# EAGLE board J2 Retrofit (EAGLE 9.1.2)
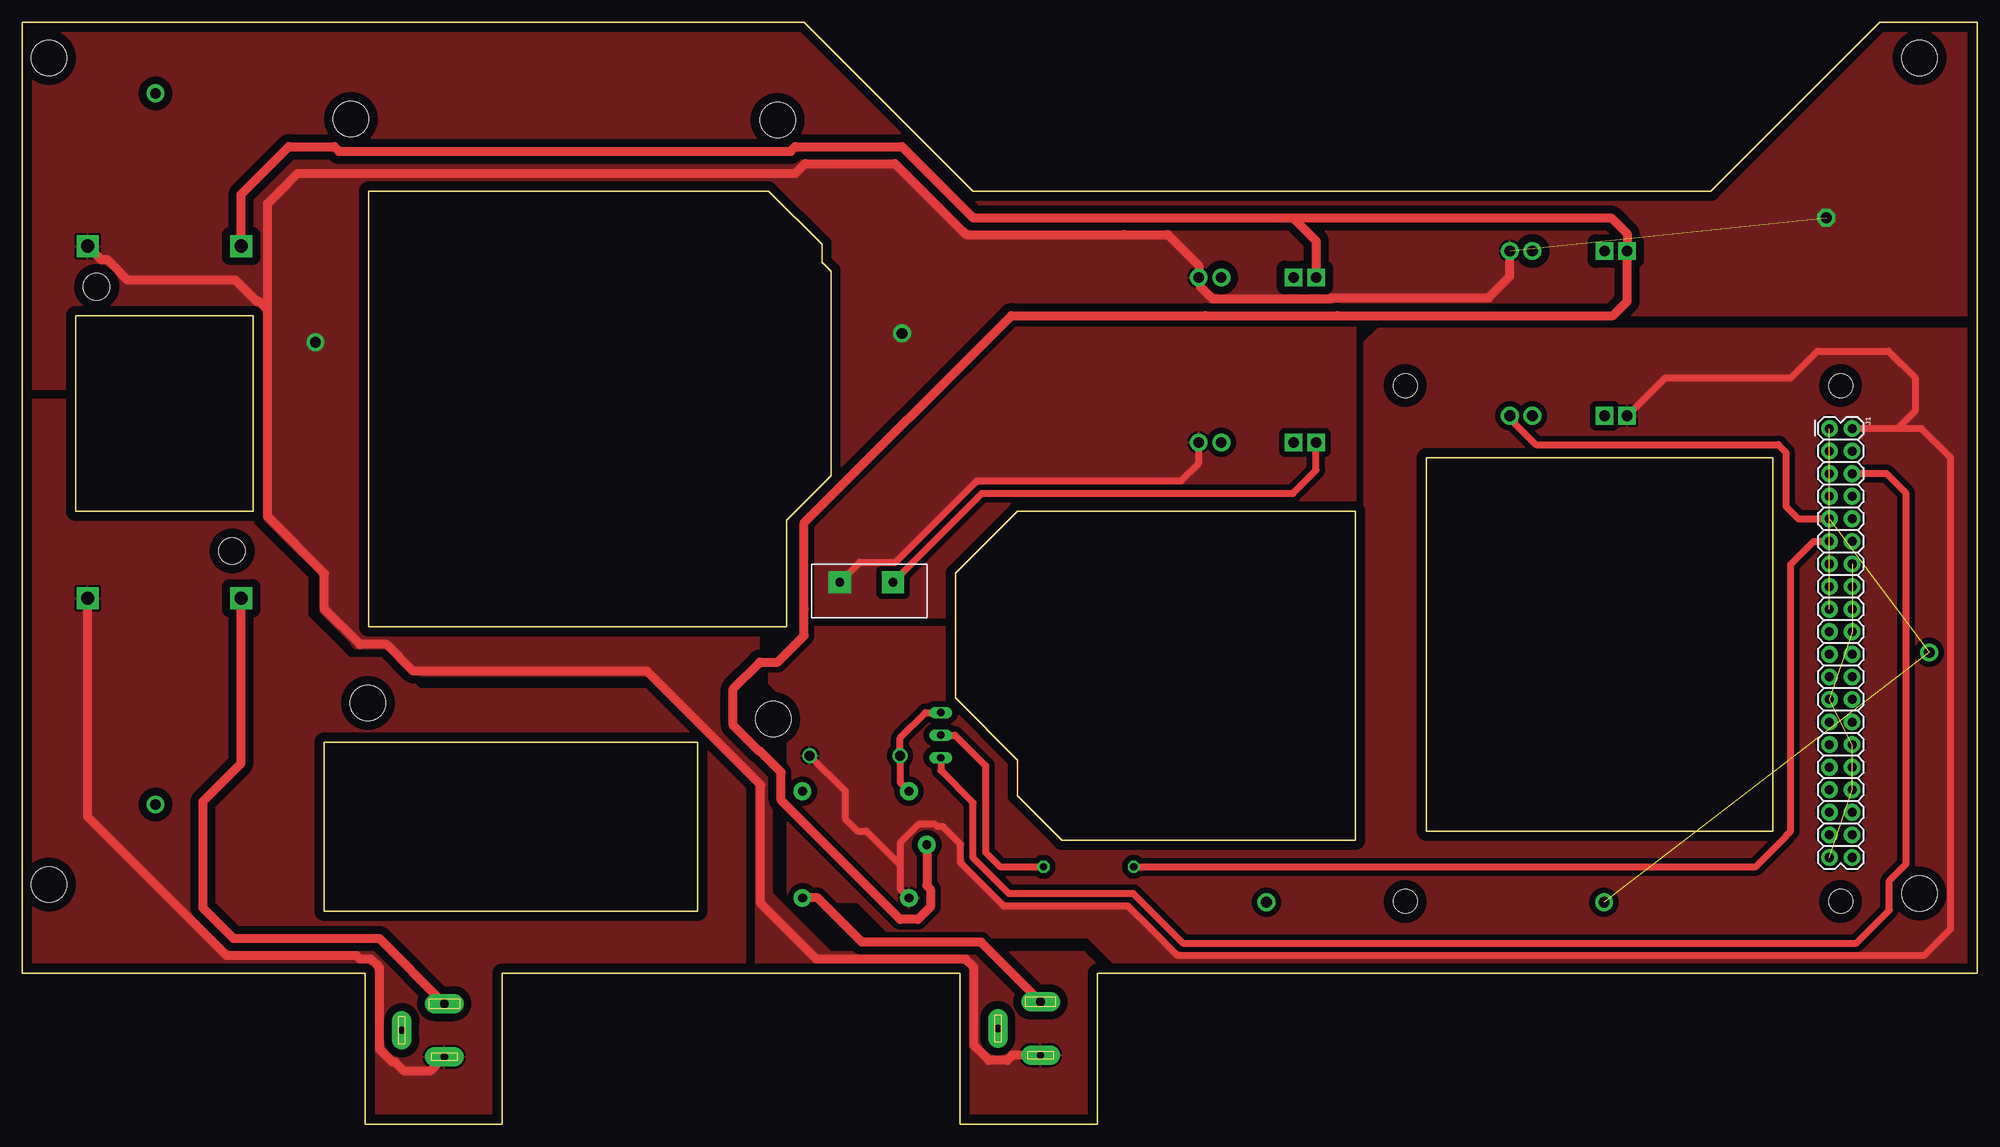
[diagram p0: board, top side]
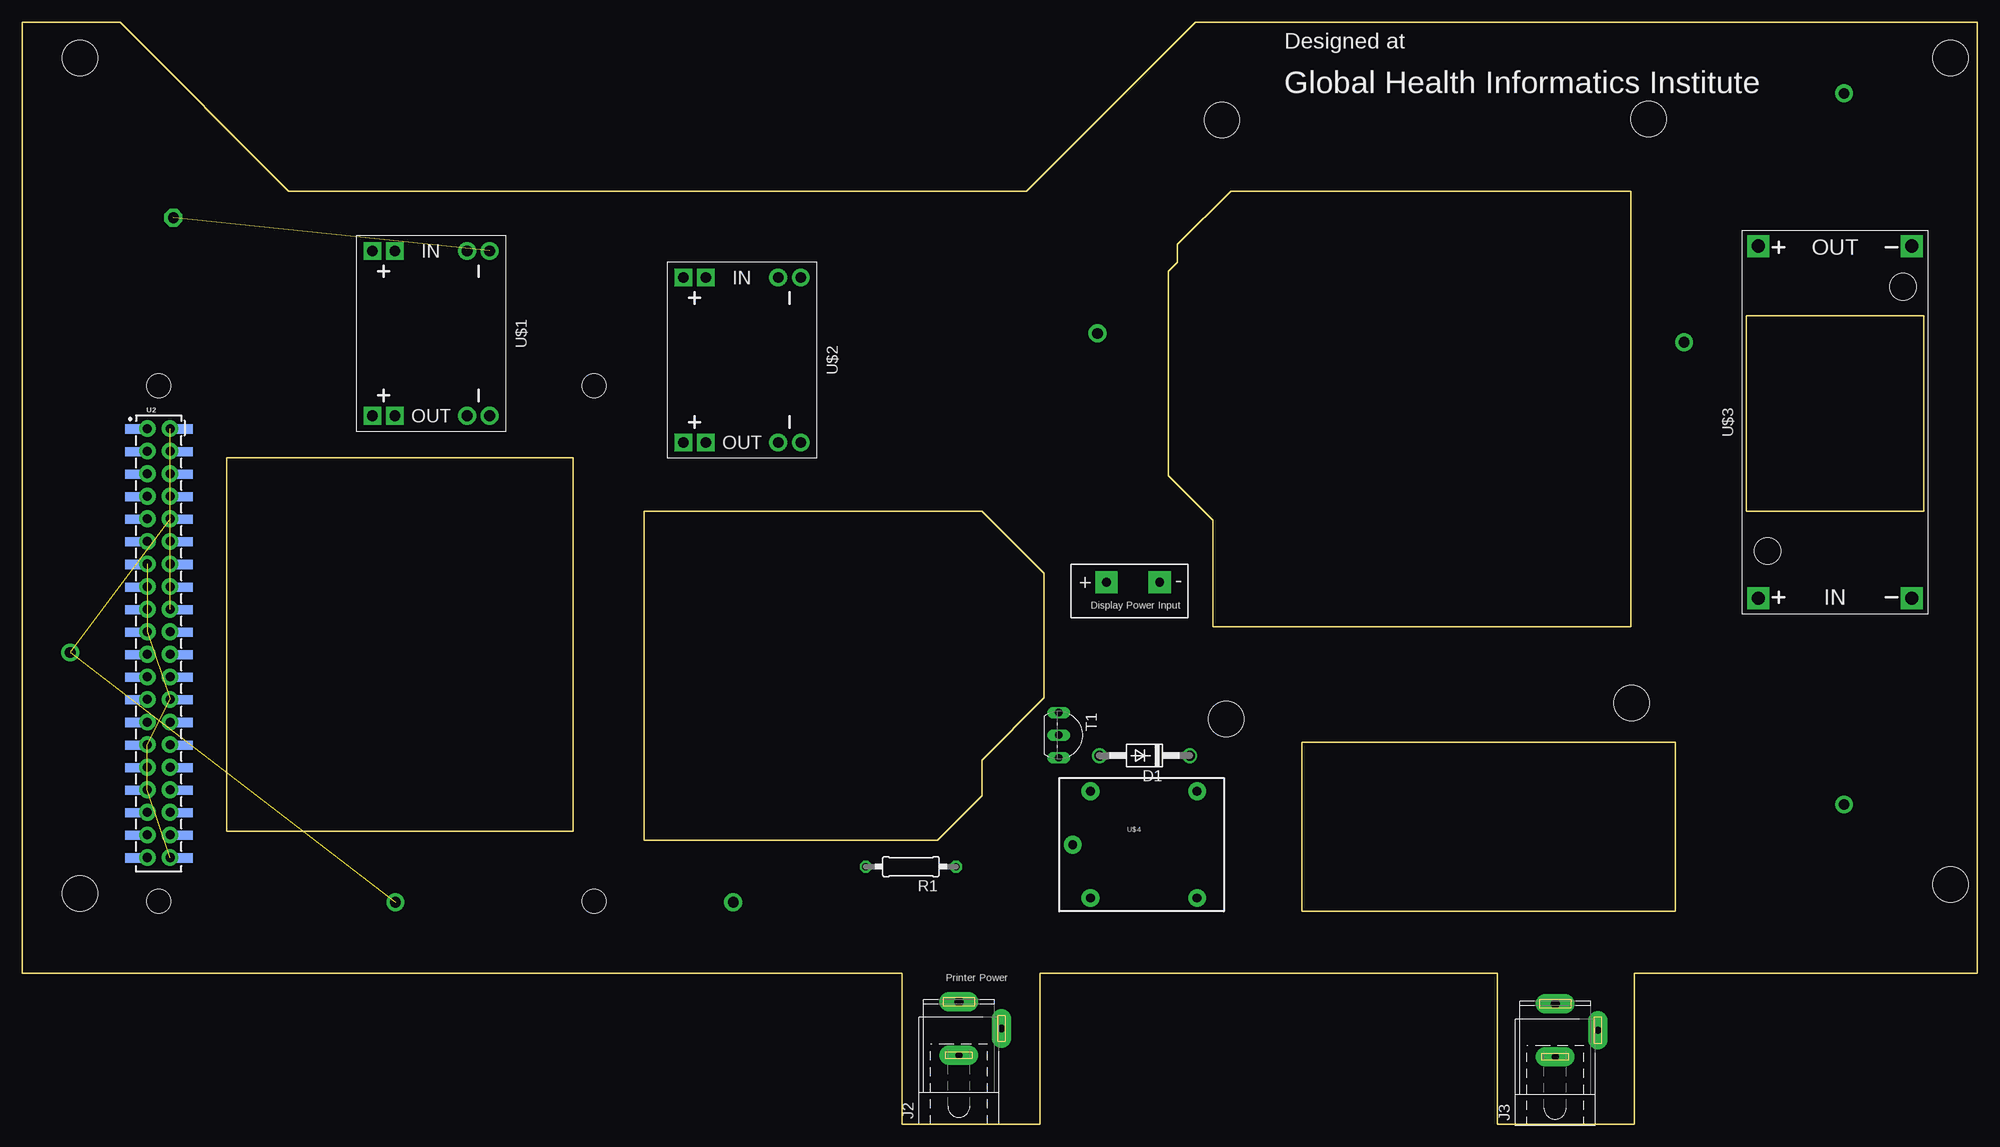
[diagram p1: board, bottom side, seen from below]

Size 220 x 124 mm. Coordinates in mm from the lower left corner, seen from the top.
Outline: 0,17 0,124 88,124 107,105 190,105 209,124 220,124 220,17 121,17 121,0 105.5,0 105.5,17 54,17 54,0 38.6,0 38.6,17 0,17
Outline: 39,105 84,105 90,99 90,97 91,96 91,73 86,68 86,56 39,56 39,105
Outline: 158,75 197,75 197,33 158,33 158,75
Outline: 6,91 26,91 26,69 6,69 6,91
Outline: 34,43 76,43 76,24 34,24 34,43
Outline: 150,69 112,69 105,62 105,48 112,41 112,37 117,32 150,32 150,69
Copper layers (1*16): Top 0.035mm / dielectric 1.5mm / Bottom 0.035mm
Design rules "default": minimum track width 6mil, minimum drill 0.35mm, track to track 6mil, track to pad 6mil, pad to pad 6mil, via to via 6mil, smd to smd 6mil, copper to edge 40mil, drill to drill 6mil, minimum pad ring 10mil, minimum via ring 8mil, stop-mask expansion 4mil, vias tented up to drill 0mil, thermal gap 10mil
Net classes: 0 default: width 0.762 mm, drill 0.762 mm, clearance 0.635 mm; 1 Power: width 1.016 mm, drill 1.016 mm, clearance 0.889 mm
Holes 4 mm at 3,27 3,120 213.5,120 213.5,26 38.9,47.4 84.5,45.6 37,113.1 85,113

## Footprints (pad centres in the part's own frame; a part is rotated, then mirrored left to right if it is on the bottom)
DO41-10 = drill 1.118: A 5.08,0; C -5.08,0
2X20 = drill 1.016 pad 1.88: 1 0,0; 2 0,2.54; 3 2.54,0; 4 2.54,2.54; 5 5.08,0; 6 5.08,2.54; 7 7.62,0; 8 7.62,2.54; 9 10.16,0; 10 10.16,2.54; 11 12.7,0; 12 12.7,2.54; 13 15.24,0; 14 15.24,2.54; 15 17.78,0; 16 17.78,2.54; 17 20.32,0; 18 20.32,2.54; 19 22.86,0; 20 22.86,2.54; 21 25.4,0; 22 25.4,2.54; 23 27.94,0; 24 27.94,2.54; 25 30.48,0; 26 30.48,2.54; 27 33.02,0; 28 33.02,2.54; 29 35.56,0; 30 35.56,2.54; 31 38.1,0; 32 38.1,2.54; 33 40.64,0; 34 40.64,2.54; 35 43.18,0; 36 43.18,2.54; 37 45.72,0; 38 45.72,2.54; 39 48.26,0; 40 48.26,2.54
SPC4078 = drill 0.8 pad 2.184 long: 1 -3,0; 2 0,-4.8 | drill 1 pad 2.184 long: 3 3,0
0207/10 = drill 0.813 octagon: 1 -5.08,0; 2 5.08,0
TO92-EBC-OVAL = drill 0.813 long: B 0,-1.27; C 2.54,-1.27; E -2.54,-1.27
RASPBERRY_PI_SHIELD_HOLES = smd 1.02 x 1.87: 1 8.382,7.686; 2 8.382,1.929; 3 10.922,7.686; 4 10.922,1.929; 5 13.462,7.686; 6 13.462,1.929; 7 16.002,7.686; 8 16.002,1.929; 9 18.542,7.686; 10 18.542,1.929; 11 21.082,7.686; 12 21.082,1.929; 13 23.622,7.686; 14 23.622,1.929; 15 26.162,7.686; 16 26.162,1.929; 17 28.702,7.686; 18 28.702,1.929; 19 31.242,7.686; 20 31.242,1.929; 21 33.782,7.686; 22 33.782,1.929; 23 36.322,7.686; 24 36.322,1.929; 25 38.862,7.686; 26 38.862,1.929; 27 41.402,7.686; 28 41.402,1.929; 29 43.942,7.686; 30 43.942,1.929; 31 46.482,7.686; 32 46.482,1.929; 33 49.022,7.686; 34 49.022,1.929; 35 51.562,7.686; 36 51.562,1.929; 37 54.102,7.686; 38 54.102,1.929; 39 56.642,7.686; 40 56.642,1.929 | hole 2.75: 3.512,4.775; 61.512,4.775; 61.512,53.775; 3.512,53.775
DC-DC-STEP-DOWN-MP1584 = drill 1.2 pad 2 square: IN+.1 -9.271,-4.064; IN+.2 -9.271,-6.604; OUT+.1 9.271,-4.064; OUT+.2 9.271,-6.604 | drill 1.2 pad 2: IN-.1 -9.271,6.604; IN-.2 -9.271,4.064; OUT-.1 9.271,6.604; OUT-.2 9.271,4.064
DC-DC-STEP-DOWN-LM2596 = drill 1.5 pad 2.5 square: IN+ -19.812,8.636; IN- -19.812,-8.636; OUT+ 19.812,8.636; OUT- 19.812,-8.636 | hole 3: -14.478,7.62; 15.24,-7.62
SRD-05VDC-SL-C = drill 1 pad 2: COIL0 -5.39,-6.12; COIL1 -5.39,5.88; SWCLOSED 6.61,-6.12; SWCOMMON -7.39,-0.12; SWOPEN 6.61,5.88

## Placement (x,y rotation side)
D1  1N4004  [DO41-10]  93.7,41.5 180 bottom
J1  RASPBERRYPI-40-PIN-GPIO_PTH_NO_SHROUD  [2X20]  203.37,78.29 270 top
J2  [SPC4078]  114.6,10.8 90 bottom
J3  [SPC4078]  47.5,10.6 90 bottom
R1  [0207/10]  120,29 180 bottom
T1  2N2222  [TO92-EBC-OVAL]  102.1,43.8 270 bottom
U2  RASPBERRY_PI_40SMD  [RASPBERRY_PI_SHIELD_HOLES]  209.41,86.62 270 bottom
U$1  DC-DC-STEP-DOWN-MP1584  [DC-DC-STEP-DOWN-MP1584]  174,89 270 bottom
U$2  DC-DC-STEP-DOWN-MP1584  [DC-DC-STEP-DOWN-MP1584]  139,86 270 bottom
U$3  DC-DC-STEP-DOWN-LM2596  [DC-DC-STEP-DOWN-LM2596]  16,79 90 bottom
U$4  RELAYPTH  [SRD-05VDC-SL-C]  94.4,31.6 0 bottom

## Library data of the parts
D1 = diode
J1 U2 = SparkFun-Connectors
J2 J3 = con-jack; OC_FARNELL: unknown; OC_NEWARK: unknown
R1 = resistor
T1 = adafruit
U$1 = GHIdiy-modules
U$2 U$3 = diy-modules
U$4 = SRD-Relay

## Nets
3.3V: J1.1 J1.17
5V: J1.4
GND: J1.14 J1.20 J1.25 J1.30 J1.34 J1.39
N$1 [Power]: J3.1 U$3.IN-
N$2: U$2.OUT-.1
N$3 [Power]: J3.3 U$3.IN+
N$4: U$2.OUT+.2
N$5 [Power]: U$1.IN+.2 U$2.IN+.2 U$3.OUT+ U$4.SWCOMMON
N$6: J1.11 R1.2
N$7: J1.6 T1.C
N$8 [Power]: J2.1 U$1.IN-.1 U$2.IN-.1 U$3.OUT-
N$9: D1.C J1.2 U$1.OUT+.2 U$4.COIL0
N$10: J1.9 U$1.OUT-.1
N$11: D1.A T1.E U$4.COIL1
N$16: R1.1 T1.B
N$18 [Power]: J2.3 U$4.SWCLOSED

## Tracks (layer width: path | path; a pad name or v marks a point on that pad's centre or on a via)
3.3V  (1 unrouted)
GND  (5 unrouted)
N$1
  Top 1.016: J3.1 45.9,6 43,6 41.98,7.02 41.67,7.02 40.2,8.49 40.2,17.66 39.26,18.6 38,18.6 37.6,19 23,19 7.36,34.64 U$3.IN-
  pour Top: 5.4,81.6 0,81.6 0,17 38.3,17 38.3,0 54,0 54,17 81.4,17 81.4,38 70.4,49 44.7,49 41.2,52.5 36.8,52.5 35.3,54 32.1,57.2 32.1,61.5 26,67.6 26,69 26,81.6
N$2  (via drill 1 pad 2.5)
  Top 0.762: v92,61 94.27,63.27 98.29,63.27 107.42,72.4 130.4,72.4 132.4,74.4 U$2.OUT-.1
  pour Top: 105,57 86,57 86,64.4 111.5,89.9 150.1,89.9 150.1,86.9 150.1,70.3 148.8,69 148,69 112,69 105,62
N$3
  Top 1.016: J3.3 40.2,20.91 23.79,20.91 20.35,24.35 20.35,36.35 24.64,40.64 U$3.IN+
N$4  (via drill 1 pad 2.5)
  Top 0.762: v98,61 108,71 143,71 145.6,73.6 U$2.OUT+.2
N$5
  Top 1.016: U$3.OUT+ 24.64,104.64 30,110 35.12,110 35.64,109.48 86.46,109.48 86.98,110 99,110 107,102 143,102 | U$2.IN+.2 145.6,99.4 143,102 | 143,102 178.81,102 180.6,100.21 U$1.IN+.2 180.6,92.6 179,91 148,91 147.97,90.97 133.15,90.97 133.12,91 111.3,91 88,67.7 88,58 88,55 85,52 83,52 80,49 80,44.9 82.9,42 83,42 85.39,39.61 85.39,36.49 98.8,23.08 100.78,23.08 102.19,24.49 102.19,26.47 101.79,26.87 U$4.SWCOMMON
N$6
  Top 0.762: J1.11 201.59,65.59 199,63 199,33 198.47,32.47 198.47,32.39 195.08,29 R1.2
N$7
  Top 0.762: J1.6 209.79,73.21 212,71 212,29.3 210.1,27.41 210.1,24.1 206.4,20.4 130.6,20.4 125,26 111,26 107,30 107,36.19 103.37,39.82 T1.C
N$8  (via drill 1.2 pad 2)  (1 unrouted)
  Top 1.016: J2.1 111.41,7.8 110.83,7.22 108.77,7.22 107.1,8.89 107.1,17.66 106.16,18.6 89.4,18.6 83.1,24.9 83.1,38.2 70.3,51 44,51 41,54 38,54 34,58 34,62 27.6,68.4 27.6,91.66 | 27.6,91.66 26.66,92.6 26.4,92.6 24,95 11.9,95 9.63,97.26 8.91,97.26 U$3.OUT- | 27.6,91.66 | 27.6,91.66 27.6,103.6 29,105 31,107 49,107 87,107 88.09,108.09 98.21,108.09 106.21,100.09 124,100.09 128.91,100.09 132.4,96.6 U$2.IN-.1 132.54,95.13 132.54,94.28 133.94,92.87 147.18,92.87 147.31,93 165,93 167.4,95.4 U$1.IN-.1
  other vias: 33,88 99,89 203,102
  pour Top: 4.7,82.7 0,82.7 0,124 88,124 107,105 190,105 209,124 221,124 221,97 220,96 220,91 174,91 119,91 110.9,91 86,66.1 86,68 91,73 91,96 90,97 90,99 84,105 83,105 39,105 39,82.7
  pour Top: 27.3,83 27.3,68 29.1,66.2 33.5,61.8 33.5,61.5 33.5,57.7 35,56.2 37,54.2 37,54 37.4,53.6 38.2,53.6 41.8,53.6 42.6,52.8 44.9,50.5 71.1,50.5 72.2,49.4 82.5,39.1 82.5,35.7 82.5,16.9 105.4,16.9 105.4,0 121,0 121,17.9 119.5,19.4 110.6,19.4 91,19.4 86.7,23.7 84.4,26 84.4,38.9 79,44.3 79,49 79,49.2 82.9,53.2 82.9,68 39,68 39,83
N$9
  Top 0.762: 211,78.29 213.71,78.29 217,75 217,22 214,19 130,19 127,22 124.4,24.6 113,24.6 110.42,24.6 105.6,29.42 105.6,31.52 103.62,33.5 102.98,33.5 102.73,33.75 100.85,33.75 98.79,31.69 98.79,29 | 211,78.29 J1.2 | U$1.OUT+.2 184.88,84 199,84 202,87 210,87 213,84 213,80.29 211,78.29 | D1.C 92.6,37.52 92.6,34.4 94,33 95,33 98.79,29.21 98.79,29 | U$4.COIL0 98.79,26.48 98.79,29
  pour Top: 84,56 84,49.65 86.1,47.55 86.1,43.9 86.1,25.9 87,25 94,25 98,21 103,21 116,21 119,21 119.9,21 123.9,17 220,17 220,89.6 152.6,89.6 151,88 151,69 150,69 150,32 117,32 112,37 112,38 112,41 105,48 105,56
N$10  (via drill 1.2 pad 2)  (2 unrouted)
  Top 0.762: U$1.OUT-.1 167.92,79.2 167.92,78.89 170.34,76.47 197.61,76.47 198.47,75.61 198.47,69.53 199.87,68.13 J1.9
  other vias: 214.6,53.1 178,25
N$11
  Top 0.762: T1.E 101.62,46.34 98.78,43.5 D1.A 98.78,38.49 U$4.COIL1
N$12  (via drill 1.2 pad 2)
  other vias: 15,116
N$13  (via drill 1.2 pad 2)
  other vias: 15,36
N$14  (via drill 1.2 pad 2)
  other vias: 140,25
N$16
  Top 0.762: R1.1 110,29 108.4,30.6 108.4,40.36 104.96,43.8 T1.B
N$18
  Top 1.016: J2.3 107.89,20.5 94.5,20.5 89.52,25.48 U$4.SWCLOSED

## Text on the board
bNames: Designed at | Global Health Informatics Institute | - | + | Display Power Input | Printer Power